# Altium PCB PCB.PcbDoc
Units mil, origin at the board's own origin, x right, y up, seen from the top; angles counter-clockwise.
Board outline 6000 x 4000 mil, 2 copper layers (Top Layer, Bottom Layer); 42 components, 26 nets, 96 pads, 10 vias.
Unrouted connection lines stored in the file: 61.
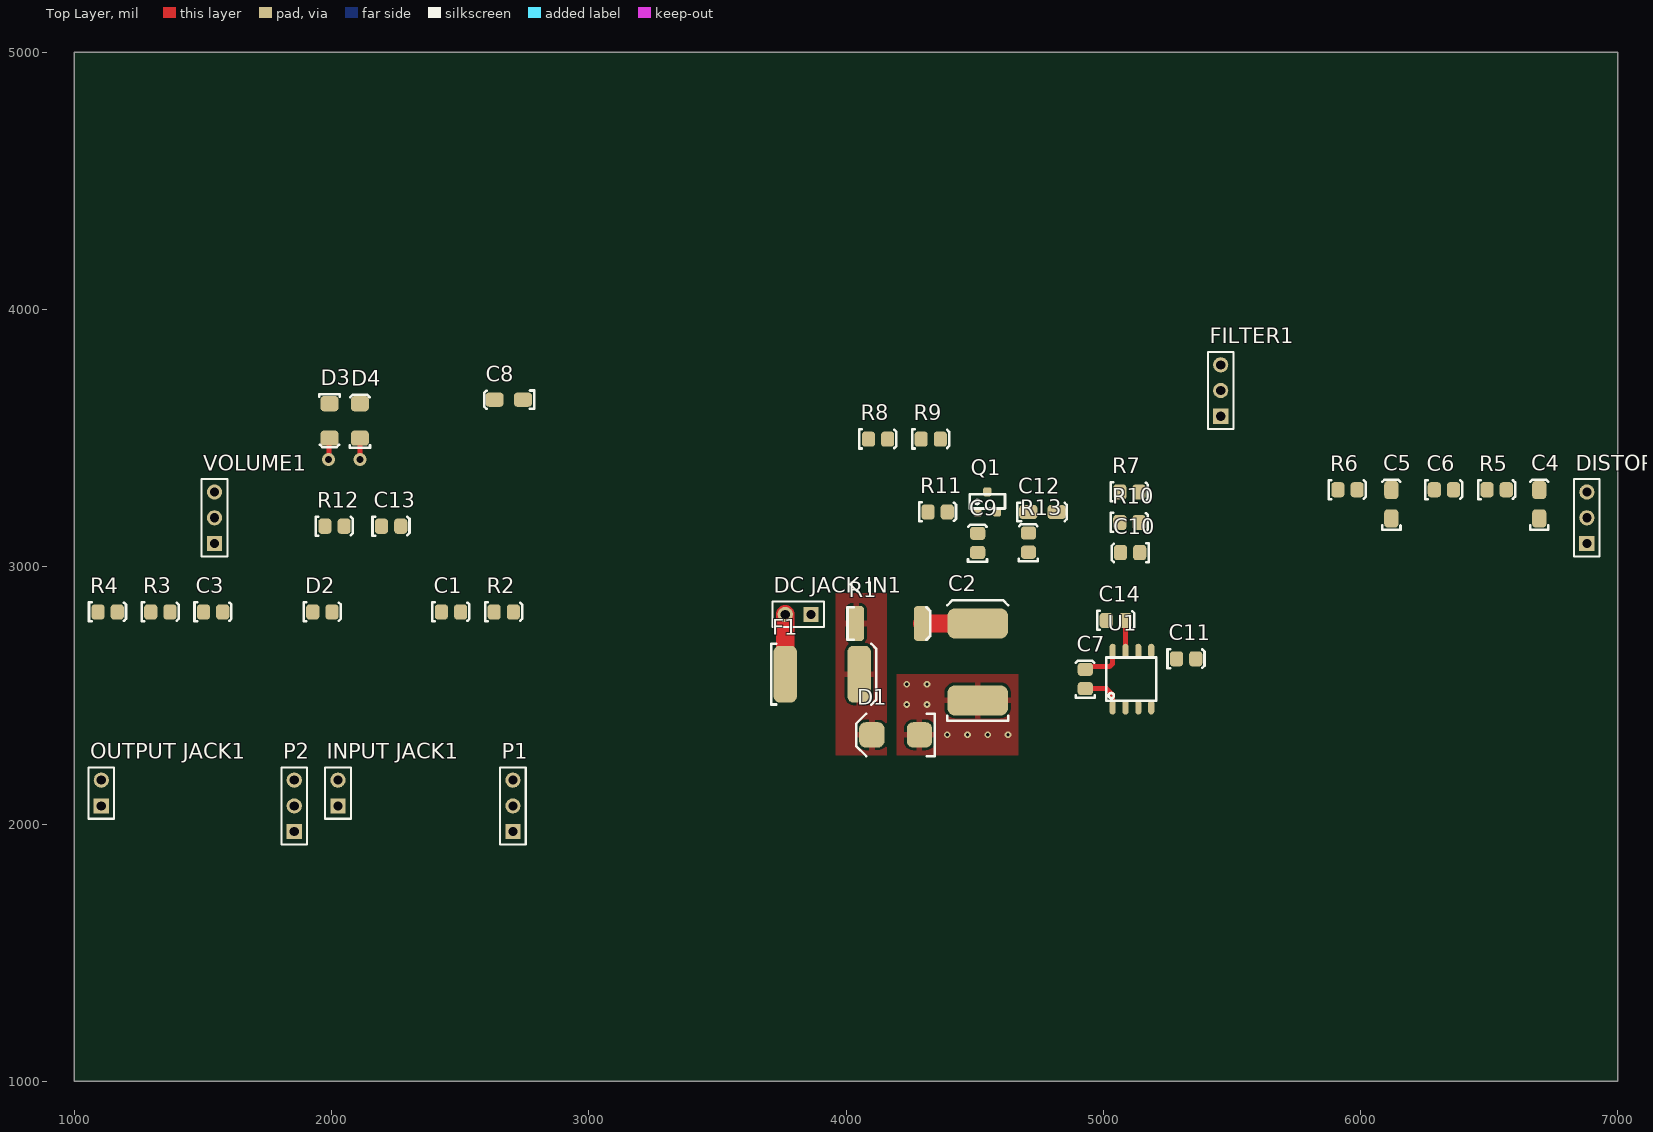
[diagram p0: Top Layer view]
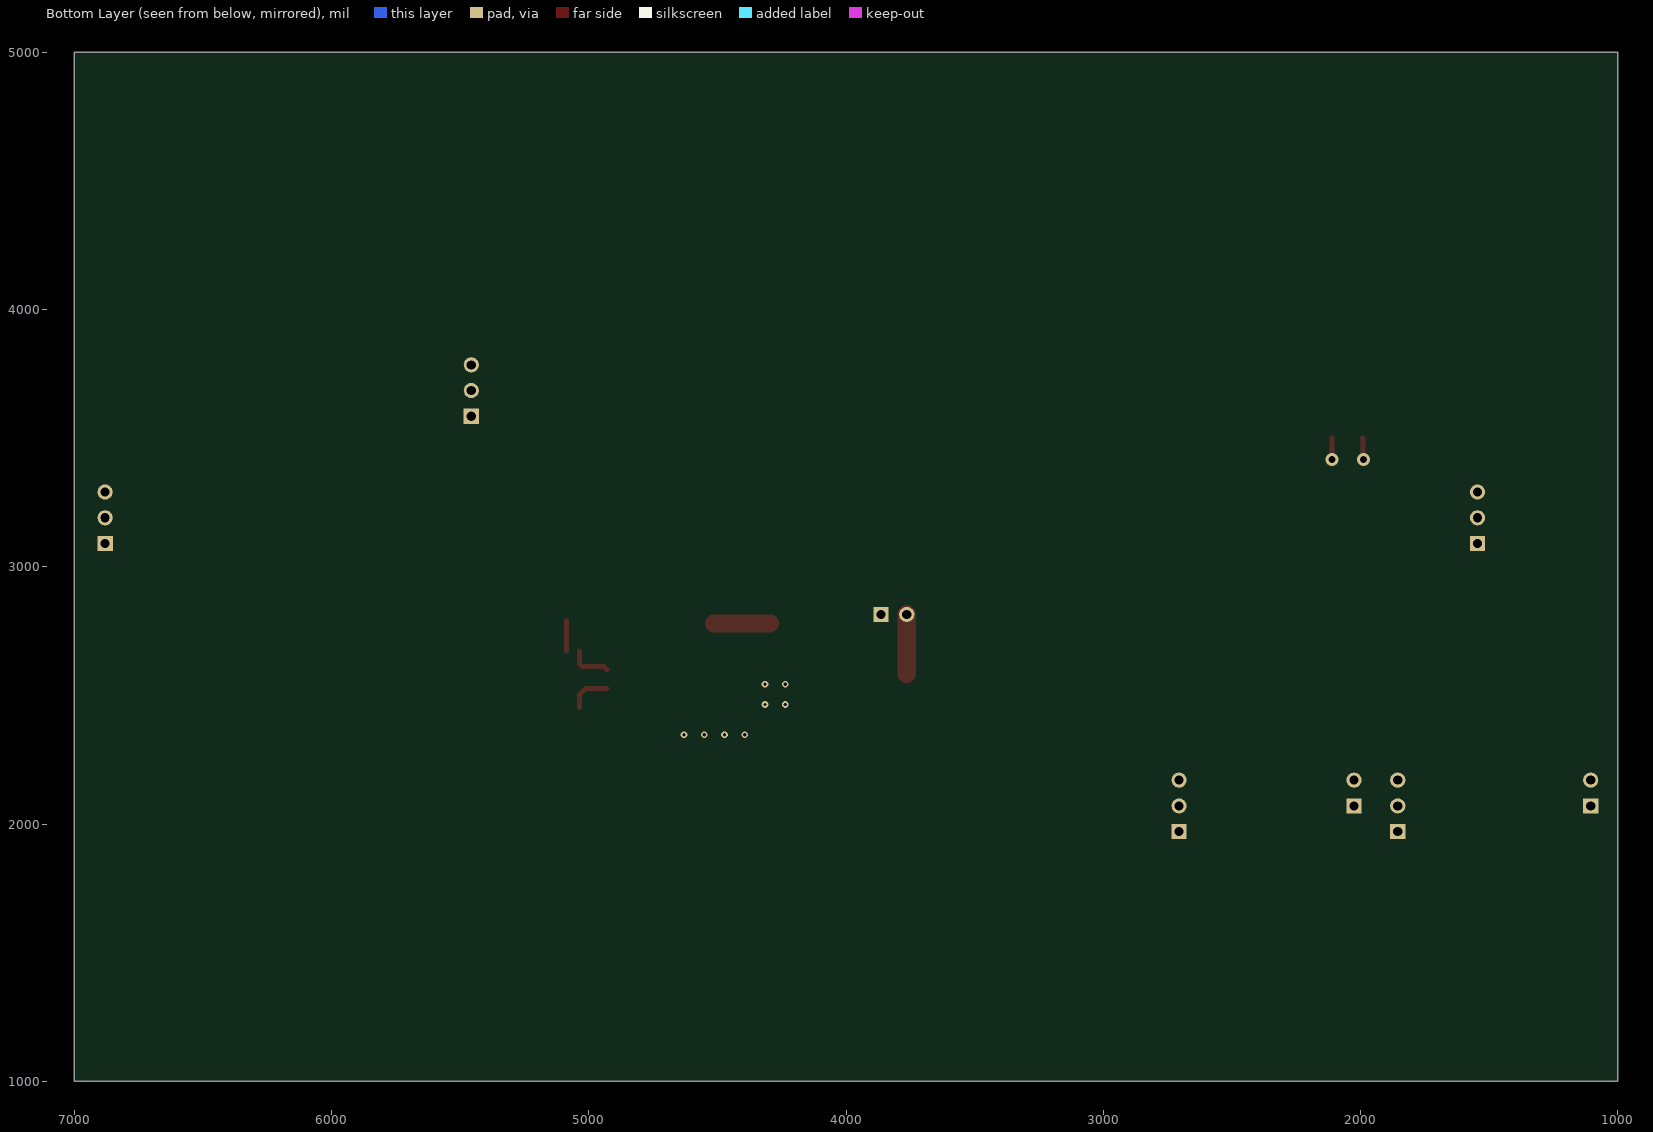
[diagram p1: Bottom Layer view, seen from below]

## Layer stack, top to bottom
Top Solder: solder mask 0.4, Solder Resist, Dk 3.5
Top Layer: signal copper 1.4
Dielectric 1: dielectric 12.6, FR-4, Dk 4.8
Bottom Layer: signal copper 1.4
Bottom Solder: solder mask 0.4, Solder Resist, Dk 3.5

## Board outline
1000,1000 7000,1000 7000,5000 1000,5000

## Design rules (kind name [scope] priority, off if disabled: settings)
Clearance [All] p1: gap=10 ignorepadtopadclearanceinfootprint=FALSE except(0: Arc-Hole Track-Hole SMDPad-Hole THPad-Hole Via-Hole Fill-Hole Poly-Hole Region-Hole Text-Hole; 3.94: THPad-THPad; 6: Arc-SMDPad Track-SMDPad SMDPad-SMDPad; 7.87: Arc-THPad Track-THPad SMDPad-THPad THPad-Via; 8: Arc-Arc Arc-Track Arc-Region Track-Track Track-Region SMDPad-Region THPad-Region Via-Region Fill-Region Poly-Region Region-Region; 23.62: Arc-Poly Track-Poly SMDPad-Poly THPad-Poly Via-Poly Fill-Poly Poly-Poly)
Height [All] p1: minheight=0 maxheight=1968.5 prefheight=500
HoleSize [All] p1: absolutevalues=TRUE maxlimit=393.7 minlimit=1 maxpercent=80.000 minpercent=20.000
PlaneClearance [All] p1: clearance=15.75
PlaneConnect [All] p1: pad.planeconnectstyle=Relief pad.reliefexpansion=20 pad.reliefentries=4 pad.reliefconductorwidth=31.5 pad.reliefairgap=10 via.planeconnectstyle=Direct via.reliefexpansion=20 via.reliefentries=4 via.reliefconductorwidth=31.5 via.reliefairgap=10
PolygonConnect [All] p1: thpad.connectstyle=Relief thpad.reliefconductorwidth=23.62 thpad.reliefentries=4 thpad.polygonreliefangle="90 Angle" thpad.airgapwidth=10 smdpad.connectstyle=Relief smdpad.reliefconductorwidth=23.62 smdpad.reliefentries=4 smdpad.polygonreliefangle="90 Angle" smdpad.airgapwidth=10 via.connectstyle=Direct via.reliefconductorwidth=23.62 via.reliefentries=4 via.polygonreliefangle="90 Angle" via.airgapwidth=10
RoutingVias [All] p1: holewidth=28 width=50 viastyle="Through Hole" minholewidth=8 minwidth=10 maxholewidth=28 maxwidth=50
SolderMaskExpansion [All] p1: expansion=2
Width [All] p1: maxlimit=118.11 minlimit=5 preferedwidth=19.68
26 further rules are at their usual default settings.

## Classes and differential pairs
component class U_Schematic: C4 C5 C6 C7 C8 C9 C10 C11 C12 C13 C14 D3 D4 DISTORTION1 FILTER1 Q1 R5 R6 R7 R8 R9 R10 R11 R12 R13 U1 VOLUME1
component class "U_Power Supply": C1 C2 C3 D1 D2 F1 R1 R2 R3 R4
component class "Top Level": "DC JACK IN1" "INPUT JACK1" "OUTPUT JACK1" P1 P2

## Components (designator, comment, footprint, x,y, rotation, side; value= is the part's Value field where it differs from the comment)
C1 "100nF" 0805 2465,2825.39 r0 top
C2 "68uF" 2924 4511.81,2627.95 r90 top
C3 "1µF" 0805 1540,2825.39 r0 top
C4 "4.7µF" 1206 6695,3290.39 r90 top
C5 "2.2µF" 1206 6120,3290.39 r90 top
C6 "100pF" 0805 6325,3300.39 r0 top
C7 "22pF" 0805 4929.13,2564.18 r90 top
C8 "4.7µF" 1206 2641.73,3649.61 r180 top
C9 "22nF" 0805 4510.78,3092.99 r90 top
C10 "22nF" 0805 5103.86,3054.09 r180 top
C11 "2.2nF" 0805 5322.72,2642.91 r0 top
C12 "1µF" 1206 4811.02,3212.6 r0 top
C13 "1nF" 0805 2232.13,3158.66 r0 top
C14 "10nF" 0805 5049.69,2792.37 r0 top
D1 "SD560BTR" "SMB Diode" 4275.59,2346.46 r180 top
D2 "Red" "0805 LED" 1965,2825.39 r0 top
D3 "FDLL4148-D87Z" "SOD-80 Diode" 1992.13,3566.93 r270 top
D4 "FDLL4148-D87Z" "SOD-80 Diode" 2110.24,3566.93 r90 top
"DC JACK IN1" "2.54mm" "TH 2.54mm Header 1x2" 3863.78,2814.96 r180 top
DISTORTION1 "Pitch" "TH 2.54mm Header 1x3" 6880,3090.39 r90 top
F1 "0ZCF0100AF2A" 2920 3763.78,2582.68 r0 top
FILTER1 "Pitch" "TH 2.54mm Header 1x3" 5456.69,3585.04 r90 top
"INPUT JACK1" "2.54mm" "TH 2.54mm Header 1x2" 2025,2070.39 r90 top
"OUTPUT JACK1" "2.54mm" "TH 2.54mm Header 1x2" 1105,2070.39 r90 top
P1 "2.54mm" "TH 2.54mm Header 1x3" 2705,1970.39 r90 top
P2 "2.54mm" "TH 2.54mm Header 1x3" 1855,1970.39 r90 top
Q1 "2SK3666" "ON SOT-23 JFET" 4549.21,3251.97 r0 top
R1 "47R" 2512 4039.37,2779.53 r0 top
R2 "100k" 0805 2670,2825.39 r0 top
R3 "100k" 0805 1335,2825.39 r0 top
R4 "1k" 0805 1130,2825.39 r0 top
R5 "560R" 0805 6530,3300.39 r0 top
R6 "47R" 0805 5950,3300.39 r0 top
R7 "1M" 0805 5102.36,3291.34 r0 top
R8 "1k" 0805 4125,3497.24 r0 top
R9 "1.5k" 0805 4330,3497.24 r0 top
R10 "1k" 0805 5102.36,3173.23 r0 top
R11 "1M" 0805 4356.77,3213.63 r0 top
R12 "1M" 0805 2012.13,3158.66 r0 top
R13 "10k" 0805 4708.66,3094.49 r90 top
U1 "OP-07DPSR" "TI 8-SOIC" 5136.61,2834.23 r90 top
VOLUME1 "Pitch" "TH 2.54mm Header 1x3" 1545,3090.39 r90 top

## Footprints (in the part's own frame and the unit in brackets; to place one, negate y for a bottom-side part, rotate by r counter-clockwise, add the part's x,y. Pads: shape width x height; smd on the part's side, far side on the other; paste and mask are expansions set on the pad)
0805 [mil]
  rrect50% 51.18x59.06 smd: 1(-37.87,-1.03) 2(36.93,-1.03)
  silkscreen extent -73,-37 71,37, body extent -39,-26 39,26, height 29
"0805 LED" [mil]
  rrect50% 51.18x59.06 smd: A(-37.87,-1.03) K(36.93,-1.03)
  silkscreen extent -73,-37 71,37, body extent -43,-25 35,25, height 39
1206 [mm]
  rrect50% 1.8x1.4 smd: 1(-2.6,0) 2(0.2,0)
  silkscreen extent -3.7,-0.9 1.2,0.9, body extent -2.9,-0.9 0.5,0.9, height 1.85
2512 [mm]
  rrect50% 1.6x3.5 smd: 1(0,0) 2(6.5,0)
  silkscreen extent -0.85,-1.6 7.3,1.6, body extent 0.1,-1.6 6.4,1.6, height 0.7
2920 [mm]
  rrect50% 2.3x5.6 smd: 1(0,0) 2(7.3,0)
  silkscreen extent -1.4,-3 9,3, body extent -0.34,-2.81 7.64,2.81, height 1.14
2924 [mm]
  rrect50% 3x6 smd: 1(-3.75,0) 2(3.85,0)
  silkscreen extent -5.75,-3 6.15,3, body extent -3.94,-2.81 4.04,2.81, height 1.14
"ON SOT-23 JFET" [mm] "NUP2105L"
  rrect50% 0.8x0.9 smd: D(0,1) G(-0.95,-1) S(0.95,-1)
  silkscreen extent -1.75,-0.65 1.75,0.75, body extent -1.5,-1.27 1.5,1.28, height 1
"SMB Diode" [mm]
  rrect50% 2.5x2.5 smd: A(-0.25,0) K(4.45,0)
  silkscreen extent -1.75,-2.1 6,2.1, body extent -0.69,-1.97 4.9,1.97, height 2.5
"SOD-80 Diode" [mm]
  rrect50% 1.5x1.8 smd: A(-1.7,0) K(1.7,0)
  silkscreen extent -2.65,-1 2.6,1, body extent -1.85,-0.8 1.85,0.8, height 1.6
"TH 2.54mm Header 1x2" [mm]
  rect 1.5x1.5 hole 0.9: 1(0,0)
  round 1.5 hole 0.9: 2(2.54,0)
  silkscreen extent -1.27,-1.27 3.81,1.27
"TH 2.54mm Header 1x3" [mm]
  rect 1.5x1.5 hole 0.9: 1(0,0)
  round 1.5 hole 0.9: 2(2.54,0) 3(5.08,0)
  silkscreen extent -1.27,-1.27 6.35,1.27
"TI 8-SOIC" [mm]
  oval 1.4x0.6 smd: 1(-9.677,2.54) 2(-9.677,1.27) 3(-9.677,0) 4(-9.677,-1.27) 5(-4.089,-1.27) 6(-4.089,0) 7(-4.089,1.27) 8(-4.089,2.54)
  silkscreen extent -9,-1.78 -4.75,3.17, body extent -9.96,-1.87 -3.76,3.14, height 1.76

## Part data
C1: library part GCM21BR71H104KA37L, Digikey Part Number=490-6064-1-ND, Manufacturer=muRata, Rated Voltage=50V, Tolerance=±10%, Material=X7R, Part Number=GCM21BR71H104KA37L
C2: library part TAJV686K035RNJ, Digikey Part Number=478-13135-1-ND, Manufacturer="AVX Corporation", Rated Voltage=35V, Tolerance=10%, Material=Tantalum, Part Number=TAJV686K035RNJ
C3: library part GCM21BR71H105KA03L, Digikey Part Number=490-10675-1-ND, Manufacturer=muRata, Rated Voltage=50V, Tolerance=±10%, Material=X7R, Part Number=GCM21BR71H105KA03L
C4 C8: library part TAJA475K025RNJ, Digikey Part Number=478-11053-1-ND, Manufacturer="AVX Corporation", Rated Voltage=25V, Tolerance=±10%, Material=Tantalum, Part Number=TAJA475K025RNJ
C5: library part TAJA225K025RNJ, Digikey Part Number=478-1662-1-ND, Manufacturer="AVX Corporation", Rated Voltage=25V, Tolerance=±10%, Material=Tantalum, Part Number=TAJA225K025RNJ
C6: library part GCM2165C1H101JA16D, Digikey Part Number=490-8031-1-ND, Manufacturer=muRata, Rated Voltage=50V, Tolerance=±5%, Material="C0G, NP0", Part Number=GCM2165C1H101JA16D
C7: library part GRM21A5C2E220JW01D, Digikey Part Number=490-5534-1-ND, Manufacturer=muRata, Rated Voltage=250V, Tolerance=±5%, Material="C0G, NP0", Part Number=GRM21A5C2E220JW01D
C9 C10: library part GCM21B5C1H223JA16L, Digikey Part Number=490-5318-1-ND, Manufacturer=muRata, Rated Voltage=50V, Tolerance=±5%, Material="C0G, NP0", Part Number=GCM21B5C1H223JA16L
C11: library part GCM2165C1H222JA16D, Digikey Part Number=490-8033-1-ND, Manufacturer=muRata, Rated Voltage=50V, Tolerance=±5%, Material="C0G, NP0", Part Number=GCM2165C1H222JA16D
C12: library part TAJA105K025RNJ, Digikey Part Number=478-2363-1-ND, Manufacturer="AVX Corporation", Rated Voltage=25V, Tolerance=±10%, Material=Tantalum, Part Number=TAJA105K025RNJ
C13: library part GCM2165C1H102JA16D, Digikey Part Number=490-8032-1-ND, Manufacturer=muRata, Rated Voltage=50V, Tolerance=±5%, Material="C0G, NP0", Part Number=GCM2165C1H102JA16D
C14: library part GCM2195C1H103JA16D, Digikey Part Number=490-4783-1-ND, Manufacturer=muRata, Rated Voltage=50V, Tolerance=±5%, Material="C0G, NP0", Part Number=GCM2195C1H103JA16D
D1: "1.2V_F 600V 5A SMB", Digikey Part Number=1655-1530-2-ND, Manufacturer="SMC Diode Solutions", Digikey Link=https://www.digikey.com/product-detail/en/smc-diode-solutions/SD560BTR/1655-1530-2-ND/6022620, Part Number=SD560BTR
D2: library part SML-210LTT86, "Red LED Indication - Discrete 1.75V 0805 (2012 Metric)", Digikey Part Number=511-1286-1-ND, Manufacturer="ROHM Semiconductor", Colour=Red, Digikey Link=https://www.digikey.com/product-detail/en/rohm-semiconductor/SML-210LTT86/511-1286-1-ND/637099, Part Number=SML-210LTT86
D3 D4: "DIODE GEN PURP 100V 200MA SOD80", Digikey Part Number=FDLL4148-D87ZCT-ND, Manufacturer="On Semiconductor", Digikey Link=https://www.digikey.com/product-detail/en/on-semiconductor/FDLL4148-D87Z/FDLL4148-D87ZCT-ND/3042567, Part Number=FDLL4148-D87Z
"DC JACK IN1" "INPUT JACK1" "OUTPUT JACK1": library part "TH 2.54mm Header 1x2", Angle=0, Contact=NA, Flange=No, Part Number="TH 2.54mm Header 1x2", Pitch=2.54mm, Positions=2, Row Spacing=2.54mm
DISTORTION1 FILTER1 VOLUME1: library part "TH 2.54mm Header 1x3", Part Number="A100K POT", Resistance=A100K, Positions=3
F1: "PTC RESET FUSE 60V 1A 292", Digikey Part Number=507-2070-1-ND, Manufacturer="Littelfuse Inc.", Digikey Link=https://www.digikey.com/product-detail/en/bel-fuse-inc/0ZCF0100AF2A/507-2070-1-ND/6210547, Part Number=0ZCF0100AF2A
P1 P2: library part "TH 2.54mm Header 1x3", Angle=0, Contact=NA, Flange=No, Part Number="TH 2.54mm Header 1x3", Pitch=2.54mm, Positions=3, Row Spacing=2.54mm
Q1: "JFET N-Channel 10mA 200mW Surface Mount 3-CP", Digikey Part Number=869-1107-1-ND, Manufacturer="ON Semiconductor", Digikey Link=https://www.digikey.com/product-detail/en/on-semiconductor/2SK3666-3-TB-E/869-1107-1-ND/2165585, LatestRevisionDate=29-May-2009, LatestRevisionNote="IPC-7351 Footprint Added.", PackageDescription="4-Pin SOT-343 Package 1.3 mm Pitch, 2.1 mm Lead Span", PackageReference=SOT-343, PackageVersion=Sep-2000, Part Number=2SK3666, Published=24-Mar-1999, Publisher="Altium Limited"
R1: library part 352147RFT, Digikey Part Number=A116000CT-ND, Manufacturer="TE Connectivity", Rated Voltage=2W, Tolerance=0.01, Part Number=352147RFT
R2 R3: library part RC0805FR07100KL, Digikey Part Number=311-100KCRCT-ND, Manufacturer=YAGEO, Rated Voltage=0.125W, Tolerance=0.01, Material=FR-07, Part Number=RC0805FR07100KL
R4 R8 R10: library part RC0805FR071KL, Digikey Part Number=311-1.00KCRCT-ND, Manufacturer=YAGEO, Rated Voltage=0.125W, Tolerance=0.01, Material=FR-07, Part Number=RC0805FR071KL
R5: library part RC0805FR07560RL, Digikey Part Number=311-560CRCT-ND, Manufacturer=YAGEO, Rated Voltage=0.125W, Tolerance=0.01, Material=FR-07, Part Number=RC0805FR07560RL
R6: library part RC0805FR0747RL, Digikey Part Number=311-47.0CRCT-ND, Manufacturer=YAGEO, Rated Voltage=0.125W, Tolerance=0.01, Material=FR-07, Part Number=RC0805FR0747RL
R7 R11 R12: library part RC0805FR071ML, Digikey Part Number=311-1.00MCRCT-ND, Manufacturer=YAGEO, Rated Voltage=0.125W, Tolerance=0.01, Material=FR-07, Part Number=RC0805FR071ML
R9: library part RC0805FR071K5L, Digikey Part Number=311-1.50KCRCT-ND, Manufacturer=YAGEO, Rated Voltage=0.125W, Tolerance=0.01, Material=FR-07, Part Number=RC0805FR071K5L
R13: library part RC0805FR0710KL, Digikey Part Number=311-10.0KCRCT-ND, Manufacturer=YAGEO, Rated Voltage=0.125W, Tolerance=0.01, Material=FR-07, Part Number=RC0805FR0710KL
U1: "General Purpose Amplifier 1 Circuit 8-SO", Digikey Part Number=296-14171-2-ND, Manufacturer="Texas Instruments", Digikey Link=https://www.digikey.com/product-detail/en/texas-instruments/OP-07DPSR/296-14171-2-ND/525998, Part Number=OP-07DPSR

## Via types
v1: diameter 26, hole 13, Top Layer to Bottom Layer, 8 vias
v2: diameter 50, hole 28, Top Layer to Bottom Layer, 2 vias

## Nets (pads, with @x,y where several pads share a name; then routed paths per layer and width w, separated by ;. In a path a pad name is that pad's centre, name@x,y a point inside that pad or via, vN(x,y) a via of type N, cw(c..) or ccw(c..) an arc to the next point about the centre after c; other vN are vias at no path point)
0V: "DC JACK IN1.1" "INPUT JACK1.2" "OUTPUT JACK1.2" C1.2 C2.1 C3.1 C4.1 C5.1 C11.1 C13.1 C14.1 D1.A D3.K D4.A R3.1 R4.1 R11.1 R12.1 R13.1 U1.4 VOLUME1.3 | length 167
  Top Layer w19.68: v2(1988.19,3417.32) 1990.16,3419.29 1990.16,3498.03 D3.K ; v2(2110.24,3417.32) D4.A
  other v1: 4393.7,2346.46 4472.44,2346.46 4551.18,2346.46 4629.92,2346.46 4236.22,2464.57 4314.96,2464.57 4236.22,2543.31 4314.96,2543.31
4.5V: C3.2 R2.1 R3.2 R7.2
9V: C1.1 C2.2 C14.2 D2.A Q1.D R1.2 R2.2 U1.7 | length 334.6
  Top Layer w19.68: U1.7 C14.2
  Top Layer w70.87: R1.2 C2.2
Bypass: P1.1 P2.1
"From Output": P2.3 VOLUME1.2
NetC4_2: C4.2 R5.1
NetC5_2: C5.2 R6.1
NetC6_1: C6.1 DISTORTION1.1 R5.2 R6.2 U1.2
NetC6_2: C6.2 DISTORTION1.2 DISTORTION1.3 R8.1 U1.6
NetC7_1: C7.1 U1.1 | length 165.7
  Top Layer w19.68: C7.1 5013.06,2526.31 5036.61,2502.76 U1.1
NetC7_2: C7.2 U1.8 | length 165.6
  Top Layer w19.68: C7.2 4940.85,2611.79 5025.18,2611.79 5035.86,2622.48 5035.86,2672.48 U1.8
NetC8_1: C8.1 R8.2
NetC8_2: C8.2 D3.A D4.K FILTER1.1
NetC9_1: C9.1 C11.2 R9.2
NetC9_2: C9.2 Q1.G R11.2
NetC10_2: C10.2 R7.1 R10.1
NetC12_1: C12.1 Q1.S R13.2
NetC12_2: C12.2 VOLUME1.1
NetC13_2: C13.2 R10.2 U1.3
NetD1_K: D1.K F1.2 R1.1
NetD2_K: D2.K R4.2
NetFILTER1_2: FILTER1.2 FILTER1.3 R9.1
"NetINPUT JACK1_1": "INPUT JACK1.1" P1.2
"NetOUTPUT JACK1_1": "OUTPUT JACK1.1" P2.2
"Power In": "DC JACK IN1.2" F1.1 | length 232.3
  Top Layer w70.87: F1.1 3763.78,2814.96
"To Input": C10.1 P1.3 R12.2
pads on no net: U1.5

## Polygon pours and split planes (outlines as drawn)
NetD1_K on Top Layer (solid, pour order 2): 3960.63,2897.64 4157.48,2897.64 4157.48,2267.72 3960.63,2267.72
0V on Top Layer (solid, pour order 0): 4196.85,2582.68 4669.29,2582.68 4669.29,2267.72 4196.85,2267.72